# Altium PCB TestBoard.PcbDoc (part 2 of 3)
Units mm, origin at the board's own origin, x right, y up, seen from the top; angles counter-clockwise.
Board outline 300 x 186 mm, 4 copper layers (Top Layer, Mid-Layer 2, Mid-Layer 1, Bottom Layer); 136 components, 264 nets, 1109 pads, 450 vias.
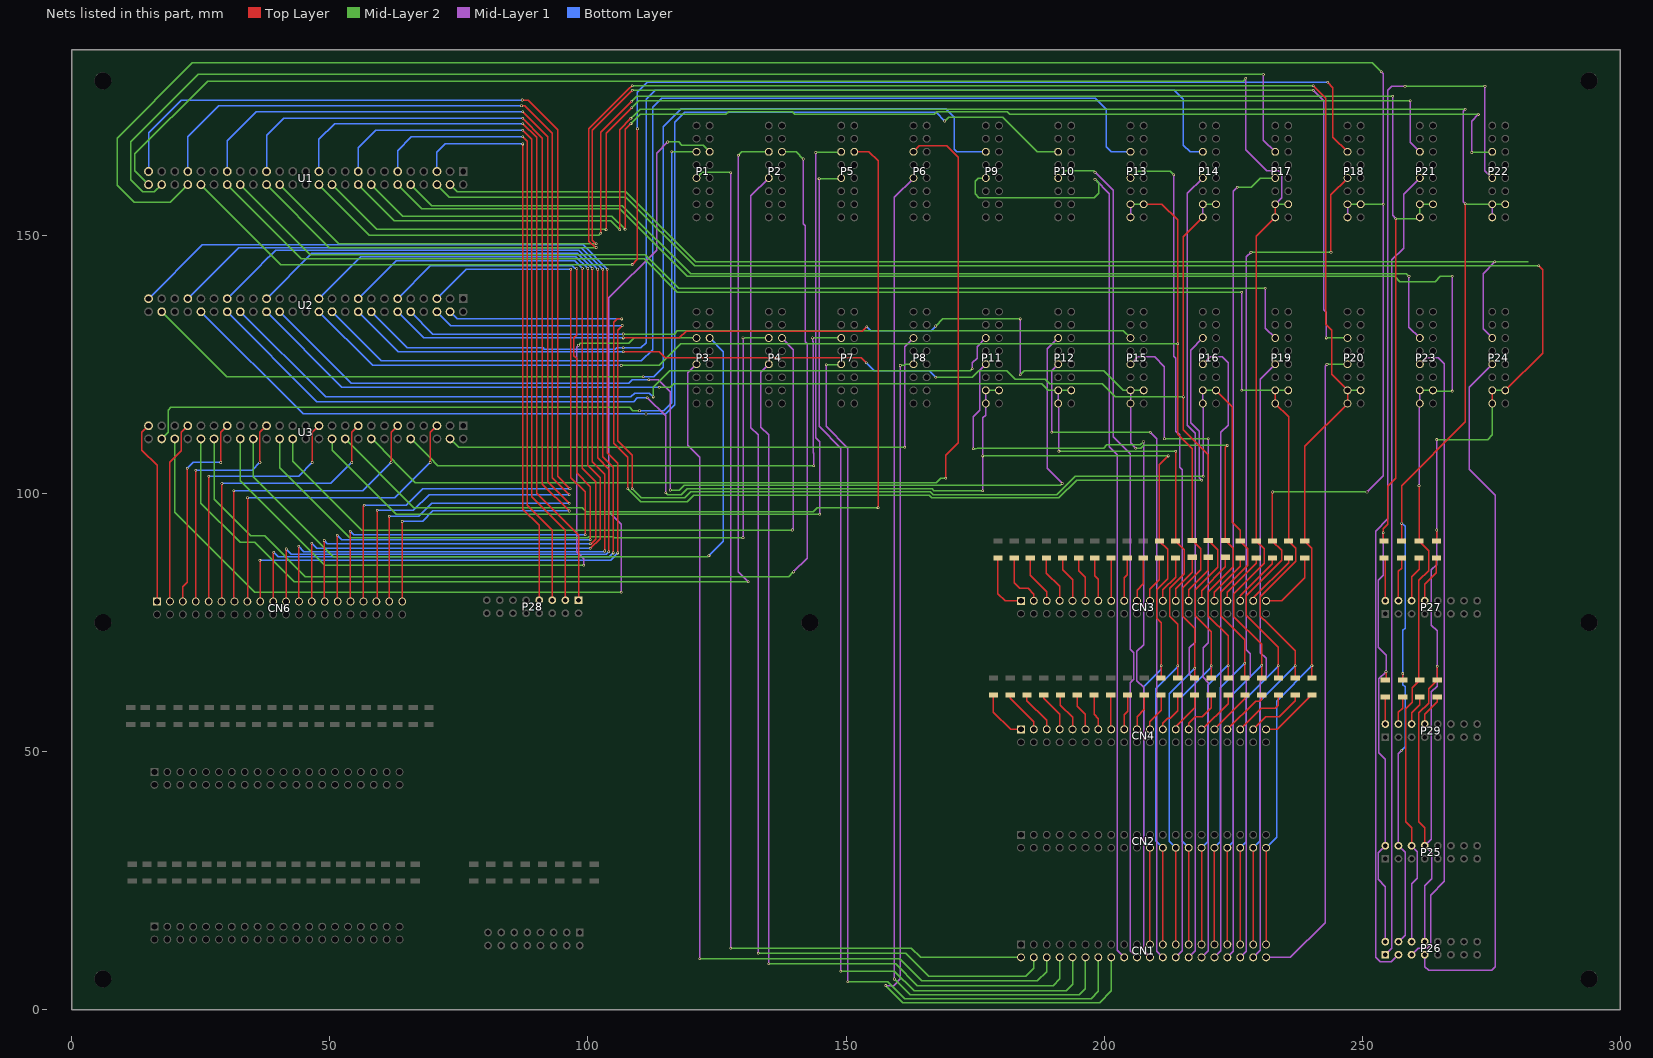
[diagram p4: the nets of this part, all layers, seen from the top]

## Via types
v1: diameter 0.508, hole 0.305, Top Layer to Bottom Layer, tented both sides, 450 vias

## Nets (pads, with @x,y where several pads share a name; then routed paths per layer and width w, separated by ;. In a path a pad name is that pad's centre, name@x,y a point inside that pad or via, vN(x,y) a via of type N, cw(c..) or ccw(c..) an arc to the next point about the centre after c; other vN are vias at no path point) (continued)
GND_RF11: CN1.21 CN2.22 P11.13 P11.14 P11.15 R35.1 R37.1 U2.38 | length 330.9
  Top Layer w0.254: CN1.21@208.895,12.66 CN2.22@208.895,31.389 ; R37.1@211.047,64.262 v1(211.047,66.675) 211.047,74.957 210.185,75.819 210.185,81.407 212.344,83.566 212.344,89.194 R35.1@210.733,90.805 210.733,105.577 v1(212.471,107.315)
  Mid-Layer 1 w0.254: v1(111.506,118.618) 115.062,115.062 v1(115.062,100.203) ; v1(176.53,100.584) v1(176.53,107.315) 176.53,114.681 177.096,115.247 P11.15@177.096,117.475 P11.13@177.096,120.015
  Mid-Layer 2 w0.254: v1(115.062,100.203) 115.443,99.822 118.11,99.822 119.253,100.965 166.668,100.965 167.049,100.584 v1(176.53,100.584) ; v1(176.53,107.315) v1(212.471,107.315) ; P11.13@177.096,120.015 P11.14@179.636,120.015
  Bottom Layer w0.254: U2.38@30.099,135.255 47.498,117.856 108.839,117.856 109.601,118.618 v1(111.506,118.618) ; CN2.22@208.895,31.389 207.645,32.639 207.645,62.611 211.047,66.013 v1(211.047,66.675)
GND_RF12: CN1.23 CN2.24 P12.13 P12.14 P12.15 R38.1 R41.1 U2.32 | length 300.9
  Top Layer w0.254: CN1.23@211.395,12.66 CN2.24@211.395,31.389 ; v1(213.868,108.204) 213.861,108.197 R38.1@213.861,90.805 215.519,89.147 215.519,84.455 212.725,81.661 212.725,76.282 214.296,74.711 v1(214.296,66.675) R41.1@214.296,64.262
  Mid-Layer 1 w0.254: P12.13@191.112,120.015 P12.15@191.112,117.475 191.262,117.325 v1(191.262,108.204)
  Mid-Layer 2 w0.254: v1(113.792,120.65) 115.951,120.65 116.586,121.285 185.674,121.285 187.96,121.285 189.23,120.015 P12.13@191.112,120.015 P12.14@193.652,120.015 ; v1(191.262,108.204) v1(213.868,108.204)
  Bottom Layer w0.254: U2.32@37.719,135.255 52.324,120.65 105.791,120.65 ; 106.934,120.65 105.791,120.65 ; v1(113.792,120.65) 105.791,120.65 ; CN2.24@211.395,31.389 210.058,32.726 210.058,62.23 214.249,66.421
GND_RF13: CN1.25 CN2.26 P13.13 P13.14 P13.15 R42.1 R44.1 U2.24 | length 334.4
  Top Layer w0.254: P13.14@207.668,156.083 211.201,156.083 214.249,153.035 214.249,111.506 217.07,108.685 R42.1@217.07,90.932 218.694,89.308 218.694,85.217 215.252,81.775 215.252,78.755 215.265,78.742 215.265,77.227 215.252,77.214 215.252,76.255 217.544,73.962 R44.1@217.544,64.262 ; CN1.25@213.895,12.66 CN2.26@213.895,31.389
  Mid-Layer 1 w0.254: P13.15@205.128,153.543 P13.13@205.128,156.083
  Mid-Layer 2 w0.254: v1(106.426,124.841) 113.792,124.841 117.983,129.032 v1(214.249,129.032) ; P13.13@205.128,156.083 P13.14@207.668,156.083
  Bottom Layer w0.254: U2.24@47.879,135.255 58.293,124.841 v1(106.426,124.841) ; CN2.26@213.895,31.389 212.598,32.686 212.598,61.214 v1@217.548,66.164
  other v1: 217.544,66.167
GND_RF14: CN1.27 CN2.28 P14.13 P14.14 P14.15 R45.1 R48.1 U2.18 | length 327.1
  Top Layer w0.254: v1(106.807,127.508) 113.792,127.508 114.935,126.365 152.908,126.365 v1(153.924,125.349) ; CN1.27@216.395,12.66 CN2.28@216.395,31.389 ; P14.15@219.144,153.543 215.392,149.791 215.392,112.395 220.198,107.589 R45.1@220.198,90.932 221.996,89.134 221.996,85.725 217.678,81.407 217.678,76.329 220.793,73.214 v1(220.793,66.675) R48.1@220.793,64.262
  Mid-Layer 1 w0.254: P14.15@219.144,153.543 P14.13@219.144,156.083
  Mid-Layer 2 w0.254: v1(167.386,122.555) 174.498,122.555 175.768,123.825 181.102,123.825 182.753,122.174 188.595,122.174 189.484,121.285 193.929,121.285 ; 194.818,121.285 193.929,121.285 ; v1(215.392,118.745) 202.184,118.745 199.644,121.285 193.929,121.285 ; P14.13@219.144,156.083 P14.14@221.684,156.083
  Bottom Layer w0.254: U2.18@55.499,135.255 63.246,127.508 v1(106.807,127.508) ; v1(153.924,125.349) 155.448,123.825 166.116,123.825 v1(167.386,122.555) ; CN2.28@216.395,31.389 215.138,32.646 215.138,60.706 220.853,66.421
GND_RF15: CN1.29 CN2.30 P15.13 P15.14 P15.15 R49.1 R51.1 U2.12 | length 296.6
  Top Layer w0.254: v1(106.807,130.175) 117.729,130.175 118.999,131.445 153.162,131.445 v1(154.051,132.334) ; CN1.29@218.895,12.66 CN2.30@218.895,31.389 ; v1(223.901,109.347) 223.52,108.966 R49.1@223.52,90.932 225.044,89.408 225.044,85.852 220.218,81.026 220.218,76.289 224.041,72.465 v1(224.041,66.675) R51.1@224.041,64.262
  Mid-Layer 1 w0.254: v1(183.769,123.063) v1(183.769,133.858) ; P15.13@205.128,120.015 P15.15@205.128,117.475 205.128,109.832 v1(206.121,108.839)
  Mid-Layer 2 w0.254: v1(167.422,132.486) 168.795,133.858 v1(183.769,133.858) ; v1(183.769,123.063) 184.531,123.825 199.898,123.825 203.708,120.015 P15.13@205.128,120.015 P15.14@207.668,120.015 ; v1(206.121,108.839) 207.137,108.839 207.645,109.347 v1(223.901,109.347)
  Bottom Layer w0.254: U2.12@63.119,135.255 68.199,130.175 v1(106.807,130.175) ; v1(154.051,132.334) 154.813,131.572 166.509,131.572 v1(167.422,132.486) ; CN2.30@218.895,31.389 220.091,32.585 220.091,62.865 v1@223.901,66.675
GND_RF16: CN1.31 CN2.32 P16.13 P16.14 P16.15 R52.1 R55.1 U2.6 | length 322.3
  Top Layer w0.254: v1(106.68,132.588) 105.791,131.699 105.791,110.236 108.585,107.442 v1(108.585,100.965) ; CN1.31@221.395,12.66 CN2.32@221.395,31.389 ; P16.14@221.684,120.015 224.825,116.875 224.825,94.513 226.374,92.964 R52.1@226.374,90.805 227.838,89.341 227.838,86.106 222.631,80.899 222.631,76.376 227.29,71.717 v1(227.29,67.143) R55.1@227.29,64.262
  Mid-Layer 1 w0.254: P16.13@219.144,120.015 P16.15@219.144,117.475 219.202,117.417 v1(219.202,103.378)
  Mid-Layer 2 w0.254: v1(108.585,100.965) 110.363,99.187 118.745,99.187 119.888,100.33 166.37,100.33 166.878,99.822 190.881,99.822 194.437,103.378 v1(219.202,103.378) ; P16.13@219.144,120.015 P16.14@221.684,120.015
  Bottom Layer w0.254: U2.6@70.739,135.255 73.406,132.588 v1(106.68,132.588) ; CN2.32@221.395,31.389 222.538,32.532 222.538,34.396 222.504,34.43 222.504,51.322 222.538,51.356 222.538,54.837 222.504,54.871 222.504,62.357 v1(227.29,67.143)
GND_RF17: CN1.33 CN2.34 P17.13 P17.14 P17.15 R56.1 R58.1 U1.50 | length 416.5
  Top Layer w0.254: CN1.33@223.895,12.66 CN2.34@223.895,31.389 ; R58.1@230.538,64.262 v1(230.538,66.769) 230.538,70.833 225.171,76.2 225.171,80.645 231.013,86.487 231.013,89.294 R56.1@229.502,90.805 229.502,145.555 229.502,149.885 P17.15@233.16,153.543 P17.13@233.16,156.083
  Mid-Layer 1 w0.254: v1(227.457,180.467) 227.457,166.624 231.521,162.56 233.888,162.56 234.442,162.006 234.442,157.365 P17.13@233.16,156.083
  Mid-Layer 2 w0.254: U1.50@14.859,159.893 12.192,162.56 12.192,165.862 26.289,179.959 152.527,179.959 ; 153.416,179.959 152.527,179.959 ; v1(227.457,180.467) 226.949,179.959 152.527,179.959 ; P17.13@233.16,156.083 P17.14@235.7,156.083
  Bottom Layer w0.254: CN2.34@223.895,31.389 225.044,32.538 225.044,61.274 v1(230.538,66.769)
GND_RF18: CN1.35 CN2.36 P18.13 P18.14 P18.15 R59.1 R62.1 U1.44 | length 487.9
  Top Layer w0.254: CN1.35@226.395,12.66 CN2.36@226.395,31.389 ; v1(232.664,100.33) 232.631,100.297 R59.1@232.631,90.805 234.442,88.994 234.442,87.122 227.538,80.218 227.538,76.469 228.422,75.585 228.453,75.585 233.787,70.251 v1(233.787,66.675) R62.1@233.787,64.262
  Mid-Layer 1 w0.254: P18.15@247.177,153.543 P18.13@247.177,156.083 ; v1(250.952,100.33) 254.127,103.505 254.127,154.94 ; v1(253.746,181.737) 254.127,181.356 v1(254.127,156.083) 254.127,154.94 ; 254.127,155.702 254.127,154.94
  Mid-Layer 2 w0.254: U1.44@22.479,159.893 19.05,156.464 12.065,156.464 8.763,159.766 8.763,168.91 23.368,183.515 251.968,183.515 v1(253.746,181.737) ; v1(232.664,100.33) v1(250.952,100.33) ; P18.13@247.177,156.083 P18.14@249.717,156.083 v1(254.127,156.083)
  Bottom Layer w0.254: CN2.36@226.395,31.389 227.584,32.578 227.584,60.325 233.68,66.421
GND_RF19: CN1.37 CN2.38 P19.13 P19.14 P19.15 R63.1 R65.1 U1.38 | length 353.7
  Top Layer w0.254: CN1.37@228.895,12.66 CN2.38@228.895,31.389 ; P19.13@233.16,120.015 P19.15@233.16,117.475 235.759,114.877 R63.1@235.759,90.805 237.109,89.455 237.109,86.868 230.251,80.01 230.251,76.256 230.922,75.585 230.993,75.585 237.035,69.543 v1(237.035,66.675) R65.1@237.035,64.262
  Mid-Layer 1 w0.254: v1(226.695,120.015) v1(226.695,139.065)
  Mid-Layer 2 w0.254: U1.38@30.099,159.893 44.45,145.542 110.871,145.542 117.348,139.065 v1(226.695,139.065) ; v1(226.695,120.015) P19.13@233.16,120.015 P19.14@235.7,120.015
  Bottom Layer w0.254: CN2.38@228.895,31.389 230.124,32.618 230.124,59.764 v1(237.035,66.675)
GND_RF20: CN1.39 CN2.40 P20.13 P20.14 P20.15 R66.1 R69.1 U1.32 | length 418.2
  Top Layer w0.254: v1(101.6,147.701) 101.464,147.701 100.203,148.962 100.203,170.688 107.95,178.435 107.95,178.444 108.576,179.07 v1(108.585,179.07) ; CN1.39@231.395,12.66 CN2.40@231.395,31.389 ; R69.1@240.284,64.262 v1(240.284,66.675) 240.284,89.408 R66.1@238.887,90.805 238.887,109.185 P20.15@247.177,117.475 P20.13@247.177,120.015 244.094,123.098 244.094,131.699 242.951,132.842 242.951,176.666 240.547,179.07 v1(240.538,179.07)
  Mid-Layer 2 w0.254: U1.32@37.719,159.893 49.911,147.701 v1(101.6,147.701) ; v1(108.585,179.07) v1(240.538,179.07) ; P20.13@247.177,120.015 P20.14@249.717,120.015
  Bottom Layer w0.254: CN2.40@231.395,31.389 233.426,33.42 233.426,59.817 v1(240.284,66.675)
GND_RF21: P21.13 P21.14 P21.15 P25.9 P26.9 R81.1 R83.1 U1.24 | length 418.6
  Top Layer w0.254: v1(102.489,150.495) 102.489,170.053 v1(108.458,176.022) ; R81.1@254.254,90.805 254.127,90.932 v1(254.127,92.456) 254.127,93.218 255.016,94.107 255.016,101.473 256.54,102.997 256.54,151.384 ; R83.1@254.508,63.881 254.635,64.008 v1(254.635,65.532) ; 256.54,152.019 256.54,151.384 ; v1(256.54,153.289) 256.54,151.384
  Mid-Layer 1 w0.254: v1(254.127,92.456) 254.127,84.201 253.111,83.185 253.111,70.231 254.635,68.707 v1(254.635,65.532) 253.238,64.135 253.238,49.784 254.508,48.514 P25.9@254.508,31.792 253.111,30.395 253.111,25.273 254.508,23.876 P26.9@254.508,13.208 ; 255.905,159.512 255.905,161.163 ; v1(255.905,177.038) 255.905,161.163 ; v1(256.54,153.289) 255.905,153.924 255.905,161.163
  Mid-Layer 2 w0.254: U1.24@47.879,159.893 57.658,150.114 102.108,150.114 v1(102.489,150.495) ; v1(108.458,176.022) 109.474,177.038 v1(255.905,177.038) ; v1(256.54,153.289) 260.939,153.289 P21.15@261.193,153.543 P21.13@261.193,156.083 P21.14@263.733,156.083
GND_RF22: P22.13 P22.14 P22.15 P25.10 P26.10 R77.1 R80.1 U1.18 | length 423.2
  Top Layer w0.254: v1(106.172,151.13) 106.172,170.561 v1(108.331,172.72) ; R77.1@257.641,90.805 v1(257.641,94.234) 257.641,101.558 270.002,113.919 v1(270.002,156.21) ; R80.1@257.852,63.881 257.91,63.939 v1(257.91,65.151)
  Mid-Layer 1 w0.254: P26.10@257.048,13.208 258.318,14.478 258.318,30.522 P25.10@257.048,31.792 257.048,49.657 v1(257.683,50.292) ; v1(270.002,156.21) 269.621,156.591 269.621,174.117 v1(270.002,174.498) ; P22.15@275.209,153.543 P22.13@275.209,156.083
  Mid-Layer 2 w0.254: U1.18@55.499,159.893 62.484,152.908 104.394,152.908 v1(106.172,151.13) ; v1@108.34,172.72 108.966,173.346 ; 108.966,173.355 110.109,174.498 v1(270.002,174.498) ; v1(270.002,156.21) 270.129,156.083 P22.13@275.209,156.083 P22.14@277.749,156.083
  Bottom Layer w0.254: v1(257.683,50.292) 258.318,50.927 258.318,62.611 257.91,63.019 v1(257.91,65.151) 257.91,73.506 258.318,73.914 258.318,93.684 v1@257.704,94.297
GND_RF23: P23.13 P23.14 P23.15 P25.11 P26.11 R74.1 R76.1 U1.12 | length 353.6
  Top Layer w0.254: P25.11@259.588,31.792 259.588,35.306 258.445,36.449 258.445,58.293 259.715,59.563 259.715,62.399 R76.1@261.197,63.881 260.997,64.081 260.997,83.197 262.89,85.09 262.89,88.942 R74.1@261.027,90.805 v1(261.027,101.515)
  Mid-Layer 1 w0.254: P26.11@259.588,13.208 259.588,24.384 260.731,25.527 260.731,30.649 P25.11@259.588,31.792 ; v1(261.027,101.515) 261.027,117.31 P23.15@261.193,117.475 P23.13@261.193,120.015 ; v1(267.462,119.888) v1(267.462,142.113)
  Mid-Layer 2 w0.254: U1.12@63.119,159.893 67.818,155.194 106.172,155.194 119.253,142.113 251.714,142.113 256.286,142.113 257.302,141.097 264.16,141.097 265.176,142.113 ; P23.13@261.193,120.015 P23.14@263.733,120.015 263.86,119.888 v1(267.462,119.888) ; 266.573,142.113 265.176,142.113 ; v1(267.462,142.113) 265.176,142.113
GND_RF24: P24.13 P24.14 P24.15 P25.12 P26.12 R71.1 R73.1 U1.6 | length 409.3
  Top Layer w0.254: P25.12@262.128,31.792 262.128,35.306 260.985,36.449 260.985,57.531 262.89,59.436 262.89,62.23 R73.1@264.541,63.881 v1(264.541,66.548) v1@264.541,66.675 ; R71.1@264.414,90.805 264.43,90.821 v1(264.43,92.964) ; P24.15@275.209,117.475 P24.13@275.209,120.015 ; P24.14@277.749,120.015 284.988,127.254 284.988,143.383 v1(284.226,144.145)
  Mid-Layer 1 w0.254: P26.12@262.128,13.208 262.128,24.003 263.525,25.4 263.525,30.395 P25.12@262.128,31.792 263.398,33.062 263.398,61.595 264.541,62.738 v1(264.541,66.548) 264.541,73.406 263.398,74.549 263.398,85.217 264.43,86.249 v1(264.43,92.964) v1(264.43,110.49)
  Mid-Layer 2 w0.254: U1.6@70.739,159.893 73.152,157.48 107.315,157.48 120.65,144.145 v1(284.226,144.145) ; v1@264.287,110.49 274.32,110.49 275.209,111.379 P24.15@275.209,117.475 ; P24.13@275.209,120.015 P24.14@277.749,120.015
"IN_DCIN_3.3V _RF1": CN6.1 U3.49 | length 35.8
  Top Layer w0.254: U3.49@14.859,113.157 13.589,111.887 13.589,108.458 16.509,105.538 CN6.1@16.509,79.101
"IN_DCIN_3.3V _RF2": CN6.3 U3.43 | length 35.5
  Top Layer w0.254: CN6.3@19.009,79.101 19.009,85.471 19.009,106.131 21.209,108.331 21.209,111.887 U3.43@22.479,113.157
"IN_DCIN_3.3V _RF3": CN6.5 U3.37 | length 40.7
  Top Layer w0.254: CN6.5@21.509,79.101 21.509,81.961 22.352,82.804 v1(22.352,104.902) ; v1(28.829,106.045) 28.829,111.887 U3.37@30.099,113.157
  Bottom Layer w0.254: v1(22.352,104.902) 23.495,106.045 v1(28.829,106.045)
"IN_DCIN_3.3V _RF4": CN6.7 U3.31 | length 46.1
  Top Layer w0.254: v1(24.003,104.521) 24.003,79.107 CN6.7@24.009,79.101 ; v1(36.449,106.045) 36.449,111.887 U3.31@37.719,113.157
  Bottom Layer w0.254: v1(24.003,104.521) 34.925,104.521 v1(36.449,106.045)
"IN_DCIN_3.3V _RF5": CN6.9 U3.23 | length 53.1
  Top Layer w0.254: CN6.9@26.509,79.101 26.543,79.135 v1(26.543,103.378) ; v1(46.609,106.045) 46.609,111.887 U3.23@47.879,113.157
  Bottom Layer w0.254: v1(26.543,103.378) 43.942,103.378 v1(46.609,106.045)
"IN_DCIN_3.3V _RF6": CN6.11 U3.17 | length 57.4
  Top Layer w0.254: CN6.11@29.009,79.101 29.083,79.175 v1(29.083,101.981) ; v1(54.229,106.045) 54.229,111.887 U3.17@55.499,113.157
  Bottom Layer w0.254: v1(29.083,101.981) 50.165,101.981 v1(54.229,106.045)
"IN_DCIN_3.3V _RF7": CN6.13 U3.11 | length 61.9
  Top Layer w0.254: v1(31.369,100.584) 31.369,79.241 CN6.13@31.509,79.101 ; v1(61.849,106.045) 61.849,111.887 U3.11@63.119,113.157
  Bottom Layer w0.254: v1(31.369,100.584) 56.388,100.584 v1(61.849,106.045)
"IN_DCIN_3.3V _RF8": CN6.15 U3.5 | length 66
  Top Layer w0.254: CN6.15@34.009,79.101 34.036,79.128 v1(34.036,99.187) ; v1(69.469,106.045) 69.469,111.887 U3.5@70.739,113.157
  Bottom Layer w0.254: v1(34.036,99.187) 62.611,99.187 v1(69.469,106.045)
"IN_DCIN_3.3V _RF9": CN6.17 U2.49 | length 229
  Top Layer w0.254: v1(36.449,87.122) 36.509,87.062 CN6.17@36.509,79.101 ; v1(103.759,143.51) 103.759,107.95 105.791,105.918 v1(105.791,88.519)
  Bottom Layer w0.254: U2.49@14.859,137.795 25.273,148.209 99.069,148.209 103.759,143.519 v1(103.759,143.51) ; v1(36.449,87.122) 104.403,87.122 105.791,88.51 v1(105.791,88.519)
"IN_DCIN_3.3V _RF10": CN6.19 U2.43 | length 218.1
  Top Layer w0.254: CN6.19@39.009,79.101 39.009,88.539 v1(39.116,88.646) ; v1(102.87,143.51) 102.87,117.348 102.87,107.188 104.902,105.156 v1(104.902,88.519)
  Bottom Layer w0.254: U2.43@22.479,137.795 32.385,147.701 98.679,147.701 v1(102.87,143.51) ; v1(39.116,88.646) 40.005,87.757 104.14,87.757 v1(104.902,88.519)
"IN_DCIN_3.3V _RF11": CN6.21 U2.37 | length 206.1
  Top Layer w0.254: CN6.21@41.509,79.101 41.529,79.121 v1(41.529,89.281) ; v1(101.854,143.51) 101.854,106.934 104.013,104.775 v1(104.013,88.773)
  Bottom Layer w0.254: U2.37@30.099,137.795 36.703,144.399 36.83,144.526 39.497,147.193 98.18,147.193 101.854,143.519 v1(101.854,143.51) ; v1(41.529,89.281) 42.545,88.265 103.514,88.265 104.013,88.764 v1(104.013,88.773)
"IN_DCIN_3.3V _RF12": CN6.23 U2.31 | length 194.2
  Top Layer w0.254: v1(43.942,89.789) 43.942,79.168 CN6.23@44.009,79.101 ; v1(100.838,143.637) 100.838,106.172 103.251,103.759 v1(103.251,88.9)
  Bottom Layer w0.254: U2.31@37.719,137.795 46.482,146.558 97.926,146.558 100.838,143.646 v1(100.838,143.637) ; v1(43.942,89.789) 44.958,88.773 103.124,88.773 v1(103.251,88.9)
"IN_DCIN_3.3V _RF13": CN6.25 U2.23 | length 178.1
  Top Layer w0.254: v1(46.482,90.424) 46.482,79.128 CN6.25@46.509,79.101 ; v1(99.949,143.637) 99.949,105.537 102.362,103.124 102.362,91.304 100.466,89.408 v1(100.457,89.408)
  Bottom Layer w0.254: v1(46.482,90.424) 47.498,89.408 v1(100.457,89.408) ; U2.23@47.879,137.795 56.007,145.923 97.663,145.923 v1(99.949,143.637)
"IN_DCIN_3.3V _RF14": CN6.27 U2.17 | length 165.7
  Top Layer w0.254: v1(48.895,90.932) 48.895,79.215 CN6.27@49.009,79.101 ; v1(98.933,143.637) 98.933,104.902 101.473,102.362 101.473,91.177 100.593,90.297 v1(100.457,90.297)
  Bottom Layer w0.254: v1(48.895,90.932) 49.53,90.297 v1(100.457,90.297) ; U2.17@55.499,137.795 62.865,145.161 97.409,145.161 v1(98.933,143.637)
"IN_DCIN_3.3V _RF15": CN6.29 U2.11 | length 154
  Top Layer w0.254: v1(51.435,91.948) 51.435,79.175 CN6.29@51.509,79.101 ; v1@97.79,143.764 v1(97.79,143.637) 97.79,130.683 97.282,130.175 97.282,126.746 97.79,126.238 97.79,104.013 100.457,101.346 v1(100.457,91.059)
  Bottom Layer w0.254: v1(51.435,91.948) 52.324,91.059 v1(100.457,91.059) ; U2.11@63.119,137.795 69.469,144.145 96.91,144.145 97.418,143.637 v1(97.79,143.637)
"IN_DCIN_3.3V _RF16": CN6.31 U2.5 | length 140.2
  Top Layer w0.254: v1(53.975,92.71) 53.975,79.135 CN6.31@54.009,79.101 ; v1(96.647,143.51) 96.647,103.124 99.441,100.33 v1(99.441,92.075)
  Bottom Layer w0.254: v1(53.975,92.71) 54.61,92.075 v1(99.441,92.075) ; U2.5@70.739,137.795 76.454,143.51 v1(96.647,143.51)
"IN_DCIN_3.3V _RF17": CN6.33 U1.49 | length 222.3
  Top Layer w0.254: CN6.33@56.509,79.101 56.509,97.657 v1(56.642,97.79) ; v1(87.249,176.276) 88.392,176.276 94.107,170.561 94.107,103.378 v1(96.52,100.965)
  Bottom Layer w0.254: U1.49@14.859,162.433 14.859,169.926 21.209,176.276 v1(87.249,176.276) ; v1(56.642,97.79) 64.77,97.79 67.945,100.965 v1(96.52,100.965)
"IN_DCIN_3.3V _RF18": CN6.35 U1.43 | length 209.6
  Top Layer w0.254: CN6.35@59.009,79.101 59.182,79.274 v1(59.182,96.774) ; v1(87.122,175.133) 87.757,175.133 93.091,169.799 93.091,103.124 v1(96.393,99.822)
  Bottom Layer w0.254: U1.43@22.479,162.433 22.479,169.164 28.448,175.133 v1(87.122,175.133) ; v1(59.182,96.774) 66.167,96.774 69.215,99.822 v1(96.393,99.822)
"IN_DCIN_3.3V _RF19": CN6.37 U1.37 | length 197.6
  Top Layer w0.254: v1(61.468,95.631) 61.468,79.142 CN6.37@61.509,79.101 ; v1(87.376,173.99) 92.202,169.164 92.202,102.362 v1(96.393,98.171)
  Bottom Layer w0.254: U1.37@30.099,162.433 30.099,168.402 35.687,173.99 v1(87.376,173.99) ; v1(61.468,95.631) 67.183,95.631 69.723,98.171 v1(96.393,98.171)
"IN_DCIN_3.3V _RF20": CN6.39 U1.31 | length 186.6
  Top Layer w0.254: v1(64.008,94.615) 64.008,79.102 CN6.39@64.009,79.101 ; v1(87.376,172.72) 91.186,168.91 91.186,101.854 v1(96.393,96.647)
  Bottom Layer w0.254: U1.31@37.719,162.433 37.719,169.418 41.021,172.72 v1(87.376,172.72) ; v1(64.008,94.615) 67.945,94.615 69.977,96.647 v1(96.393,96.647)
"IN_DCIN_3.3V _RF21": P28.1 U1.23 | length 143.8
  Top Layer w0.254: v1(87.376,171.704) 90.043,169.037 90.043,100.076 98.171,91.948 P28.1@98.171,79.375
  Bottom Layer w0.254: U1.23@47.879,162.433 47.879,168.656 50.927,171.704 v1(87.376,171.704)
"IN_DCIN_3.3V _RF22": P28.2 U1.17 | length 132.3
  Top Layer w0.254: v1(87.376,170.434) 89.154,168.656 89.154,99.441 95.631,92.964 P28.2@95.631,79.375
  Bottom Layer w0.254: U1.17@55.499,162.433 55.499,167.005 58.928,170.434 v1(87.376,170.434)
"IN_DCIN_3.3V _RF23": P28.3 U1.11 | length 121.6
  Top Layer w0.254: v1(87.376,169.164) 88.265,168.275 88.265,97.79 93.091,92.964 P28.3@93.091,79.375
  Bottom Layer w0.254: U1.11@63.119,162.433 63.119,166.497 65.786,169.164 v1(87.376,169.164)
"IN_DCIN_3.3V _RF24": P28.4 U1.5 | length 110.7
  Top Layer w0.254: v1(87.376,167.767) 87.376,97.028 90.551,93.853 P28.4@90.551,79.375
  Bottom Layer w0.254: U1.5@70.739,162.433 70.739,166.116 72.39,167.767 v1(87.376,167.767)
NetCN3_1: CN3.1 R1.2 | length 12.6
  Top Layer w0.254: R1.2@179.451,87.555 179.451,80.645 180.868,79.228 CN3.1@184.53,79.228
NetCN3_3: CN3.3 R3.2 | length 10.9
  Top Layer w0.254: R3.2@182.579,87.555 182.579,82.724 183.642,81.661 185.293,81.661 186.395,80.559 CN3.3@186.395,79.228
NetCN3_5: CN3.5 R7.2 | length 9.6
  Top Layer w0.254: R7.2@185.707,87.555 185.707,84.168 188.895,80.98 CN3.5@188.895,79.228
NetCN3_7: CN3.7 R10.2 | length 9.4
  Top Layer w0.254: R10.2@188.836,87.555 188.836,84.595 191.395,82.036 CN3.7@191.395,79.228
NetCN3_9: CN3.9 R14.2 | length 9.1
  Top Layer w0.254: R14.2@191.964,87.555 191.964,85.277 193.895,83.346 CN3.9@193.895,79.228
NetCN3_11: CN3.11 R17.2 | length 8.9
  Top Layer w0.254: R17.2@195.092,87.555 195.092,85.07 196.395,83.767 CN3.11@196.395,79.228
NetCN3_13: CN3.13 R21.2 | length 8.6
  Top Layer w0.254: R21.2@198.22,87.555 198.22,84.101 198.895,83.426 CN3.13@198.895,79.228
NetCN3_15: CN3.15 R24.2 | length 8.3
  Top Layer w0.254: R24.2@201.348,87.555 201.348,82.931 201.395,82.884 CN3.15@201.395,79.228
NetCN3_17: CN3.17 R28.2 | length 8.6
  Top Layer w0.254: CN3.17@203.895,79.228 203.895,83.746 204.477,84.328 R28.2@204.477,87.555
NetCN3_19: CN3.19 R31.2 | length 8.8
  Top Layer w0.254: CN3.19@206.395,79.228 206.395,81.3 207.605,82.51 R31.2@207.605,87.555
NetCN3_21: CN3.21 R35.2 | length 9.1
  Top Layer w0.254: CN3.21@208.895,79.228 208.895,81.514 210.733,83.352 R35.2@210.733,87.555
NetCN3_23: CN3.23 R38.2 | length 9.3
  Top Layer w0.254: CN3.23@211.395,79.228 211.395,81.347 213.861,83.813 R38.2@213.861,87.555
NetCN3_25: CN3.25 R42.2 | length 9.8
  Top Layer w0.254: CN3.25@213.895,79.228 213.895,81.561 217.07,84.736 R42.2@217.07,87.682
NetCN3_27: CN3.27 R45.2 | length 10
  Top Layer w0.254: CN3.27@216.395,79.228 216.395,81.394 220.198,85.197 R45.2@220.198,87.682
NetCN3_29: CN3.29 R49.2 | length 10.4
  Top Layer w0.254: CN3.29@218.895,79.228 218.895,81.227 223.52,85.852 R49.2@223.52,87.682
NetCN3_31: CN3.31 R52.2 | length 10.4
  Top Layer w0.254: CN3.31@221.395,79.228 221.395,80.933 222.03,81.568 222.136,81.674 226.374,85.912 R52.2@226.374,87.555
NetCN3_33: CN3.33 R56.2 | length 10.6
  Top Layer w0.254: CN3.33@223.895,79.228 223.895,80.893 229.502,86.5 R56.2@229.502,87.555
NetCN3_35: CN3.35 R59.2 | length 10.9
  Top Layer w0.254: CN3.35@226.395,79.228 226.395,80.218 232.631,86.454 R59.2@232.631,87.555
NetCN3_37: CN3.37 R63.2 | length 11.2
  Top Layer w0.254: CN3.37@228.895,79.228 228.895,79.797 235.759,86.661 R63.2@235.759,87.555
NetCN3_39: CN3.39 R66.2 | length 12.6
  Top Layer w0.254: CN3.39@232.03,79.228 234.422,79.228 238.887,83.693 R66.2@238.887,87.555
NetCN4_1: CN4.1 R2.2 | length 10.1
  Top Layer w0.254: R2.2@178.562,61.012 178.562,57.658 181.891,54.329 CN4.1@183.895,54.329
NetCN4_3: CN4.3 R6.2 | length 8.6
  Top Layer w0.254: R6.2@181.811,61.012 181.811,60.378 186.395,55.794 CN4.3@186.395,54.329
NetCN4_5: CN4.5 R9.2 | length 8.3
  Top Layer w0.254: R9.2@185.059,61.012 185.059,59.924 188.895,56.088 CN4.5@188.895,54.329
NetCN4_7: CN4.7 R13.2 | length 8
  Top Layer w0.254: R13.2@188.308,61.012 188.308,60.358 191.395,57.271 CN4.7@191.395,54.329
NetCN4_9: CN4.9 R16.2 | length 7.7
  Top Layer w0.254: R16.2@191.556,61.012 191.556,59.015 193.895,56.676 CN4.9@193.895,54.329
NetCN4_11: CN4.11 R20.2 | length 7.3
  Top Layer w0.254: R20.2@194.805,61.012 194.805,58.814 196.395,57.224 CN4.11@196.395,54.329
NetCN4_13: CN4.13 R23.2 | length 7
  Top Layer w0.254: R23.2@198.053,61.012 198.053,57.217 198.895,56.375 CN4.13@198.895,54.329
NetCN4_15: CN4.15 R27.2 | length 6.7
  Top Layer w0.254: R27.2@201.302,61.012 201.302,54.423 CN4.15@201.395,54.329
NetCN4_17: CN4.17 R30.2 | length 7
  Top Layer w0.254: CN4.17@203.895,54.329 203.895,57.21 204.55,57.865 R30.2@204.55,61.012
NetCN4_19: CN4.19 R34.2 | length 7.3
  Top Layer w0.254: CN4.19@206.395,54.329 206.395,56.789 207.799,58.193 R34.2@207.799,61.012
NetCN4_21: CN4.21 R37.2 | length 7.6
  Top Layer w0.254: CN4.21@208.895,54.329 208.895,55.86 211.047,58.012 R37.2@211.047,61.012
NetCN4_23: CN4.23 R41.2 | length 8.2
  Top Layer w0.254: CN4.23@211.395,54.329 211.395,55.566 212.344,56.515 212.852,56.515 214.296,57.959 R41.2@214.296,61.012
NetCN4_25: CN4.25 R44.2 | length 8.2
  Top Layer w0.254: CN4.25@213.895,54.329 213.895,54.891 217.544,58.54 R44.2@217.544,61.012
NetCN4_27: CN4.27 R48.2 | length 9.3
  Top Layer w0.254: CN4.27@216.395,54.329 216.395,55.486 217.678,56.769 219.075,56.769 220.793,58.487 R48.2@220.793,61.012
NetCN4_29: CN4.29 R51.2 | length 8.9
  Top Layer w0.254: CN4.29@218.895,54.329 219.048,54.329 224.041,59.322 R51.2@224.041,61.012
NetCN4_31: CN4.31 R55.2 | length 9.1
  Top Layer w0.254: CN4.31@221.395,54.329 227.29,60.224 R55.2@227.29,61.012
NetCN4_33: CN4.33 R58.2 | length 9.9
  Top Layer w0.254: CN4.33@223.895,54.329 229.383,59.817 230.157,59.817 230.538,60.198 R58.2@230.538,61.012
NetCN4_35: CN4.35 R62.2 | length 11.3
  Top Layer w0.254: CN4.35@226.395,54.329 230.486,58.42 233.045,58.42 233.172,58.42 233.787,59.035 R62.2@233.787,61.012
NetCN4_37: CN4.37 R65.2 | length 11.6
  Top Layer w0.254: CN4.37@228.895,54.329 231.335,56.769 233.934,56.769 237.035,59.87 R65.2@237.035,61.012
NetCN4_39: CN4.39 R69.2 | length 11.7
  Top Layer w0.254: CN4.39@231.395,54.329 233.601,54.329 R69.2@240.284,61.012
NetP27_9: P27.9 R81.2 | length 8.1
  Top Layer w0.254: P27.9@254.508,79.248 R81.2@254.508,87.301
NetP27_10: P27.10 R77.2 | length 8.6
  Top Layer w0.254: P27.10@257.048,79.248 257.048,84.963 257.641,85.556 R77.2@257.641,87.555
NetP27_11: P27.11 R74.2 | length 8.9
  Top Layer w0.254: P27.11@259.588,79.248 259.588,83.947 261.027,85.386 R74.2@261.027,87.555
NetP27_12: P27.12 R71.2 | length 9.3
  Top Layer w0.254: P27.12@262.128,79.248 262.128,82.423 264.414,84.709 R71.2@264.414,87.555
NetP29_9: P29.9 R83.2 | length 5.3
  Top Layer w0.254: P29.9@254.508,55.372 R83.2@254.508,60.631
NetP29_10: P29.10 R80.2 | length 5.6
  Top Layer w0.254: P29.10@257.048,55.372 257.048,57.658 257.852,58.462 R80.2@257.852,60.631
NetP29_11: P29.11 R76.2 | length 5.9
  Top Layer w0.254: P29.11@259.588,55.372 259.588,57.531 261.197,59.14 R76.2@261.197,60.631
NetP29_12: P29.12 R73.2 | length 6.3
  Top Layer w0.254: P29.12@262.128,55.372 262.128,57.277 264.541,59.69 R73.2@264.541,60.631
RESET_RF1: CN1.2 P1.9 | length 214.4
  Mid-Layer 1 w0.254: v1(127.635,11.938) v1(127.635,162.179)
  Mid-Layer 2 w0.254: P1.9@121.031,161.163 122.174,162.306 127.508,162.306 v1(127.635,162.179) ; v1(127.635,11.938) 162.687,11.938 164.465,10.16 CN1.2@183.895,10.16
RESET_RF2: CN1.4 P2.9 | length 210.3
  Mid-Layer 1 w0.254: v1(132.969,10.922) 132.969,111.379 131.572,112.776 131.572,157.688 P2.9@135.047,161.163
  Mid-Layer 2 w0.254: v1(132.969,10.922) 161.544,10.922 165.989,6.477 184.785,6.477 186.395,8.087 CN1.4@186.395,10.16
RESET_RF3: CN1.6 P3.9 | length 189.3
  Mid-Layer 1 w0.254: P3.9@121.031,125.095 119.38,123.444 119.38,109.347 121.666,107.061 v1(121.666,9.906)
  Mid-Layer 2 w0.254: v1(121.666,9.906) 160.401,9.906 164.719,5.588 187.071,5.588 188.895,7.412 CN1.6@188.895,10.16
RESET_RF4: CN1.8 P4.9 | length 180.3
  Mid-Layer 1 w0.254: v1(135.001,8.89) 135.001,111.379 133.477,112.903 133.477,123.525 P4.9@135.047,125.095
  Mid-Layer 2 w0.254: v1(135.001,8.89) 159.639,8.89 163.83,4.699 190.119,4.699 191.395,5.975 CN1.8@191.395,10.16
RESET_RF5: CN1.10 P5.9 | length 212
  Mid-Layer 1 w0.254: v1@144.78,161.163 v1(144.78,161.036) 144.78,113.03 148.971,108.839 v1(148.971,7.493)
  Mid-Layer 2 w0.254: v1(144.78,161.036) 148.936,161.036 P5.9@149.063,161.163 ; v1(148.971,7.493) 159.385,7.493 163.195,3.683 192.659,3.683 193.895,4.919 CN1.10@193.895,10.16
RESET_RF6: CN1.12 P6.9 | length 201.5
  Mid-Layer 1 w0.254: v1(159.385,5.969) 159.385,157.468 P6.9@163.08,161.163
  Mid-Layer 2 w0.254: v1(159.385,5.969) 162.433,2.921 195.199,2.921 196.395,4.117 CN1.12@196.395,10.16
RESET_RF7: CN1.14 P7.9 | length 181.3
  Mid-Layer 1 w0.254: v1(146.177,124.968) 146.177,113.03 150.368,108.839 v1(150.368,5.461)
  Mid-Layer 2 w0.254: v1(146.177,124.968) 148.936,124.968 P7.9@149.063,125.095 ; v1(150.368,5.461) 158.115,5.461 161.417,2.159 197.485,2.159 198.895,3.569 CN1.14@198.895,10.16
RESET_RF8: CN1.16 P8.9 | length 177.3
  Mid-Layer 1 w0.254: v1(157.734,4.699) 159.258,4.699 160.528,5.969 v1(160.528,124.841)
  Mid-Layer 2 w0.254: v1(157.734,4.699) 161.036,1.397 199.136,1.397 201.395,3.656 CN1.16@201.395,10.16 ; v1(160.528,124.841) 161.29,124.841 161.544,125.095 P8.9@163.08,125.095
RESET_RF9: CN1.18 P9.9 | length 185.5
  Mid-Layer 1 w0.254: v1(198.247,160.909) 201.041,158.115 201.041,109.093 202.565,107.569 202.565,11.49 CN1.18@203.895,10.16
  Mid-Layer 2 w0.254: P9.9@177.096,161.163 175.641,161.163 175.006,160.528 175.006,158.115 175.768,157.353 198.12,157.353 199.009,158.242 199.009,160.147 v1(198.247,160.909)
RESET_RF10: CN1.20 P10.9 | length 163.9
  Mid-Layer 1 w0.254: v1(198.247,162.306) 201.803,158.75 201.803,110.998 205.105,107.696 205.105,69.85 205.74,69.215 205.74,64.008 205.105,63.373 205.105,11.45 CN1.20@206.395,10.16
  Mid-Layer 2 w0.254: P10.9@191.112,161.163 192.509,162.56 197.993,162.56 v1(198.247,162.306)
RESET_RF11: CN1.22 P11.9 | length 152.5
  Mid-Layer 1 w0.254: v1(174.625,108.712) 174.625,114.935 175.895,116.205 175.895,123.894 P11.9@177.096,125.095 ; v1(207.645,110.109) 207.645,70.739 206.375,69.469 206.375,63.754 207.645,62.484 207.645,11.41 CN1.22@208.895,10.16
  Mid-Layer 2 w0.254: v1(174.625,108.712) 175.26,108.712 175.387,108.839 199.898,108.839 200.533,109.474 207.01,109.474 v1(207.645,110.109)
RESET_RF12: CN1.24 P12.9 | length 135.5
  Mid-Layer 1 w0.254: v1(189.865,111.887) 189.865,123.848 P12.9@191.112,125.095 ; v1(208.915,111.887) 210.185,110.617 210.185,11.37 CN1.24@211.395,10.16
  Mid-Layer 2 w0.254: v1(189.865,111.887) v1(208.915,111.887)
RESET_RF13: CN1.26 P13.9 | length 162
  Mid-Layer 1 w0.254: v1(213.487,161.798) 213.487,126.619 213.868,126.238 213.868,112.141 214.63,111.379 214.63,105.156 215.138,104.648 215.138,11.403 CN1.26@213.895,10.16
  Mid-Layer 2 w0.254: P13.9@205.128,161.163 206.398,162.433 212.852,162.433 v1(213.487,161.798)
RESET_RF14: CN1.28 P14.9 | length 154.4
  Mid-Layer 1 w0.254: CN1.28@216.395,10.16 217.678,11.443 217.678,63.881 216.535,65.024 216.535,70.104 217.678,71.247 217.678,111.76 216.154,113.284 216.154,158.173 P14.9@219.144,161.163
RESET_RF15: CN1.30 P15.9 | length 132.3
  Mid-Layer 1 w0.254: P15.9@205.128,125.095 206.525,126.492 209.776,126.492 211.709,124.559 v1(211.709,110.617) ; CN1.30@218.895,10.16 220.218,11.483 220.218,63.373 219.202,64.389 219.202,70.104 220.218,71.12 v1(220.218,110.617)
  Mid-Layer 2 w0.254: v1(211.709,110.617) v1(220.218,110.617)
RESET_RF16: CN1.32 P16.9 | length 122.2
  Mid-Layer 1 w0.254: P16.9@219.144,125.095 220.541,126.492 222.885,126.492 224.028,125.349 224.028,113.284 222.631,111.887 222.631,11.396 CN1.32@221.395,10.16
RESET_RF17: CN1.34 P17.9 | length 158.1
  Mid-Layer 1 w0.254: CN1.34@223.895,10.16 225.044,11.309 225.044,158.623 v1(225.806,159.385)
  Mid-Layer 2 w0.254: v1(225.806,159.385) 228.473,159.385 230.251,161.163 P17.9@233.16,161.163
RESET_RF18: CN1.36 P18.9 | length 169.3
  Top Layer w0.254: v1(243.967,146.812) 243.967,157.953 P18.9@247.177,161.163
  Mid-Layer 1 w0.254: CN1.36@226.395,10.16 227.584,11.349 227.584,63.754 228.346,64.516 228.346,68.961 227.584,69.723 227.584,145.923 v1(228.473,146.812)
  Mid-Layer 2 w0.254: v1(228.473,146.812) v1(243.967,146.812)
RESET_RF19: CN1.38 P19.9 | length 117.6
  Mid-Layer 1 w0.254: CN1.38@228.895,10.16 230.251,11.516 230.251,63.627 231.394,64.77 231.394,68.072 230.251,69.215 230.251,122.186 P19.9@233.16,125.095
RESET_RF20: CN1.40 P20.9 | length 128.4
  Mid-Layer 1 w0.254: CN1.40@231.395,10.16 236.093,10.16 242.824,16.891 242.824,118.872 ; 242.824,120.742 242.824,118.872 ; v1(243.205,125.095) 242.824,124.714 242.824,118.872
  Mid-Layer 2 w0.254: v1(243.205,125.095) P20.9@247.177,125.095
RESET_RF21: P21.9 P26.1 | length 153.3
  Mid-Layer 1 w0.254: P26.1@254.508,10.668 255.778,11.938 255.778,145.288 258.064,147.574 258.064,158.034 P21.9@261.193,161.163
RESET_RF22: P22.9 P26.2 | length 212
  Mid-Layer 1 w0.254: P26.2@257.048,10.668 255.651,9.271 253.492,9.271 252.603,10.16 252.603,92.71 255.016,95.123 255.016,178.181 255.778,178.943 v1(258.318,178.943) v1@258.318,179.07 ; v1(273.812,178.943) 273.812,162.56 P22.9@275.209,161.163
  Mid-Layer 2 w0.254: v1(258.318,178.943) v1(273.812,178.943)
RESET_RF23: P23.9 P26.3 | length 124
  Mid-Layer 1 w0.254: P26.3@259.588,10.668 260.858,11.938 262.636,11.938 263.259,12.561 263.259,22.213 265.938,24.892 265.938,125.222 264.795,126.365 262.463,126.365 P23.9@261.193,125.095
RESET_RF24: P24.9 P26.4 | length 137.3
  Mid-Layer 1 w0.254: P26.4@262.128,10.668 262.128,8.382 262.89,7.62 275.082,7.62 275.844,8.382 275.844,31.877 275.844,99.695 270.764,104.775 270.764,120.65 P24.9@275.209,125.095
RXD0_RF1: P1.5 U3.48 | length 158.2
  Mid-Layer 2 w0.254: U3.48@17.399,110.617 18.669,111.887 18.669,116.205 19.177,116.713 108.077,116.713 108.712,116.078 v1(109.982,116.078) ; v1(116.205,166.243) P1.5@121.031,166.243
  Bottom Layer w0.254: v1(109.982,116.078) 114.681,116.078 116.205,117.602 v1(116.205,166.243)
RXD0_RF2: P2.5 U3.42 | length 214.4
  Mid-Layer 1 w0.254: v1(129.159,165.608) 129.159,84.836 v1(131.064,82.931)
  Mid-Layer 2 w0.254: U3.42@25.019,110.617 25.019,98.171 32.639,90.551 35.433,90.551 43.053,82.931 v1(131.064,82.931) ; v1(129.159,165.608) 129.794,166.243 P2.5@135.047,166.243
RXD0_RF3: P3.5 U3.36 | length 148.3
  Mid-Layer 1 w0.254: v1(98.171,128.778) 97.79,128.397 97.79,88.773 99.187,87.376 v1(99.187,86.106)
  Mid-Layer 2 w0.254: U3.36@32.639,110.617 32.639,102.489 49.022,86.106 v1(99.187,86.106) ; v1(98.171,128.778) 98.552,129.159 107.95,129.159 108.966,130.175 P3.5@121.031,130.175
RXD0_RF4: P4.5 U3.30 | length 145
  Mid-Layer 1 w0.254: v1(130.048,91.44) 130.048,113.157 v1(130.048,130.175)
  Mid-Layer 2 w0.254: U3.30@40.259,110.617 40.259,105.029 53.848,91.44 99.94,91.44 100.194,91.694 104.902,91.694 105.156,91.44 v1(130.048,91.44) ; v1(130.048,130.175) P4.5@135.047,130.175
RXD0_RF5: P5.5 U3.22 | length 177.2
  Mid-Layer 1 w0.254: v1(144.145,166.116) 144.145,110.871 144.907,110.109 v1(144.907,96.012)
  Mid-Layer 2 w0.254: U3.22@50.419,110.617 50.419,108.458 62.865,96.012 v1(144.907,96.012) ; v1(144.145,166.116) 148.936,166.116 P5.5@149.063,166.243
RXD0_RF6: P6.5 U3.16 | length 188.4
  Top Layer w0.254: P6.5@163.08,166.243 164.223,167.386 169.545,167.386 171.704,165.227 171.704,109.855 169.291,107.442 v1(169.291,102.997)
  Mid-Layer 2 w0.254: U3.16@58.039,110.617 58.175,110.617 62.484,106.308 62.484,106.172 66.548,102.108 167.513,102.108 168.402,102.997 v1(169.291,102.997)
RXD0_RF7: P7.5 U3.10 | length 111.3
  Mid-Layer 1 w0.254: v1@143.637,105.537 v1(143.764,105.41) 143.764,107.823 143.637,107.95 143.637,129.413 143.51,129.54 v1(143.51,130.175) v1@143.637,130.048
  Mid-Layer 2 w0.254: U3.10@65.659,110.617 65.795,110.617 70.104,106.308 70.104,106.172 70.866,105.41 v1(143.764,105.41) ; v1(143.51,130.175) P7.5@149.063,130.175 P7.5@148.936,130.302
RXD0_RF8: P8.5 U3.4 | length 112.8
  Mid-Layer 1 w0.254: v1(161.417,108.966) 161.417,128.512 P8.5@163.08,130.175
  Mid-Layer 2 w0.254: U3.4@73.279,110.617 74.93,108.966 158.496,108.966 ; 160.528,108.966 158.496,108.966 ; v1(161.417,108.966) 158.496,108.966
RXD0_RF9: P9.5 U2.48 | length 220.8
  Mid-Layer 2 w0.254: U2.48@17.399,135.255 29.972,122.682 v1(110.744,122.682)
  Bottom Layer w0.254: v1(110.744,122.682) 112.776,122.682 114.554,124.46 114.554,171.069 118.11,174.625 169.291,174.625 170.942,172.974 170.942,166.751 171.45,166.243 P9.5@177.096,166.243
RXD0_RF10: P10.5 U2.42 | length 234.3
  Mid-Layer 2 w0.254: v1(169.164,172.212) 169.926,172.974 180.34,172.974 187.071,166.243 P10.5@191.112,166.243
  Bottom Layer w0.254: U2.42@25.019,135.255 44.831,115.443 v1(111.252,115.443) 115.062,115.443 116.84,117.221 116.84,171.958 118.745,173.863 167.513,173.863 v1(169.164,172.212)
RXD0_RF11: P11.5 U2.36 | length 160.9
  Mid-Layer 1 w0.254: v1@112.649,118.736 v1(112.649,118.745) ; v1(174.498,124.206) 174.498,125.349 175.387,126.238 175.387,128.466 P11.5@177.096,130.175
  Mid-Layer 2 w0.254: v1(112.649,118.745) 112.649,120.65 115.824,123.825 174.117,123.825 v1(174.498,124.206)
  Bottom Layer w0.254: U2.36@32.639,135.255 49.149,118.745 105.918,118.745 ; 107.061,118.745 105.918,118.745 ; v1(112.649,118.745) 111.887,119.507 109.093,119.507 108.331,118.745 105.918,118.745
RXD0_RF12: P12.5 U2.30 | length 211.8
  Mid-Layer 1 w0.254: v1(111.76,122.047) 113.665,122.047 115.951,119.761 v1(115.951,100.711) ; 188.976,123.615 188.976,121.92 ; P12.5@191.112,130.175 188.976,128.039 188.976,121.92 ; v1(191.897,101.981) 188.976,104.902 188.976,121.92
  Mid-Layer 2 w0.254: v1(115.951,100.711) 117.729,100.711 118.618,101.6 191.516,101.6 v1(191.897,101.981)
  Bottom Layer w0.254: U2.30@40.259,135.255 54.102,121.412 105.156,121.412 ; 106.807,121.412 105.156,121.412 ; v1(111.76,122.047) 108.585,122.047 107.95,121.412 105.156,121.412
RXD0_RF13: P13.5 U2.22 | length 215.8
  Bottom Layer w0.254: U2.22@50.419,135.255 59.944,125.73 110.363,125.73 112.522,127.889 112.522,174.879 114.3,176.657 198.247,176.657 200.406,174.498 200.406,167.259 201.422,166.243 P13.5@205.128,166.243
RXD0_RF14: P14.5 U2.16 | length 222.6
  Bottom Layer w0.254: U2.16@58.039,135.255 65.024,128.27 91.313,128.27 91.567,128.016 105.283,128.016 105.537,128.27 v1(106.807,128.27) 110.236,128.27 111.252,129.286 111.252,176.403 113.03,178.181 213.614,178.181 215.392,176.403 215.392,167.513 216.662,166.243 P14.5@219.144,166.243
RXD0_RF15: P15.5 U2.10 | length 142.1
  Mid-Layer 2 w0.254: v1(106.807,130.937) 116.713,130.937 117.348,131.572 203.731,131.572 P15.5@205.128,130.175
  Bottom Layer w0.254: U2.10@65.659,135.255 69.977,130.937 v1(106.807,130.937)
RXD0_RF16: P16.5 U2.4 | length 212.9
  Top Layer w0.254: v1(106.553,133.858) 105.664,133.858 105.029,133.223 105.029,109.728 107.696,107.061 v1(107.696,100.965)
  Mid-Layer 1 w0.254: v1(218.948,102.616) 218.44,103.124 218.44,112.141 216.789,113.792 216.789,127.82 P16.5@219.144,130.175
  Mid-Layer 2 w0.254: v1(107.696,100.965) 107.696,100.956 110.227,98.425 119.253,98.425 120.523,99.695 166.116,99.695 166.624,99.187 191.262,99.187 194.691,102.616 v1(218.948,102.616)
  Bottom Layer w0.254: U2.4@73.279,135.255 74.676,133.858 v1(106.553,133.858)
RXD0_RF17: P17.5 U1.48 | length 255.7
  Mid-Layer 1 w0.254: v1(230.886,181.229) 230.886,168.517 P17.5@233.16,166.243
  Mid-Layer 2 w0.254: U1.48@17.399,159.893 16.002,158.496 13.716,158.496 11.43,160.782 11.43,168.148 24.511,181.229 v1(230.886,181.229)
RXD0_RF18: P18.5 U1.42 | length 273.4
  Top Layer w0.254: v1(108.585,144.399) 109.601,145.415 v1(109.601,170.688) ; v1(243.332,179.705) 244.348,178.689 244.348,169.072 P18.5@247.177,166.243
  Mid-Layer 2 w0.254: U1.42@25.019,159.893 40.513,144.399 v1(108.585,144.399)
  Bottom Layer w0.254: v1(109.601,170.688) 109.601,177.8 111.506,179.705 v1(243.332,179.705)
RXD0_RF19: P19.5 U1.36 | length 217.4
  Mid-Layer 1 w0.254: v1(231.267,139.827) 231.267,132.068 P19.5@233.16,130.175
  Mid-Layer 2 w0.254: U1.36@32.639,159.893 46.228,146.304 111.125,146.304 117.602,139.827 v1(231.267,139.827)
RXD0_RF20: P20.5 U1.30 | length 284.5
  Top Layer w0.254: v1(101.6,148.463) 101.464,148.463 100.838,149.089 100.838,170.434 v1(108.585,178.181)
  Mid-Layer 1 w0.254: v1(240.538,178.181) 242.57,176.149 242.57,135.636 243.078,135.128 v1(243.078,130.175)
  Mid-Layer 2 w0.254: U1.30@40.259,159.893 51.689,148.463 v1(101.6,148.463) ; v1(108.585,178.181) v1(240.538,178.181) ; v1(243.078,130.175) P20.5@247.177,130.175
RXD0_RF21: P21.5 U1.22 | length 244.5
  Top Layer w0.254: v1(103.505,151.13) 103.505,169.799 v1(108.458,174.752)
  Mid-Layer 1 w0.254: v1(259.334,176.149) 259.334,168.102 P21.5@261.193,166.243
  Mid-Layer 2 w0.254: U1.22@50.419,159.893 59.055,151.257 103.378,151.257 v1(103.505,151.13) ; v1(108.458,174.752) 109.855,176.149 v1(259.334,176.149)
RXD0_RF22: P22.5 U1.16 | length 252.3
  Top Layer w0.254: v1(107.188,151.257) 107.188,170.57 108.322,171.704 v1(108.331,171.704)
  Mid-Layer 1 w0.254: v1(271.272,166.116) 271.272,172.212 v1(272.542,173.482)
  Mid-Layer 2 w0.254: U1.16@58.039,159.893 64.135,153.797 104.648,153.797 v1(107.188,151.257) ; v1(108.331,171.704) 110.109,173.482 126.746,173.482 127.254,173.99 139.573,173.99 140.081,173.482 167.132,173.482 167.64,173.99 181.229,173.99 181.737,173.482 268.859,173.482 ; 269.875,173.482 268.859,173.482 ; v1(271.272,166.116) 275.082,166.116 P22.5@275.209,166.243 ; v1(272.542,173.482) 268.859,173.482
RXD0_RF23: P23.5 U1.10 | length 213.6
  Mid-Layer 1 w0.254: v1(259.08,142.113) 259.08,132.288 P23.5@261.193,130.175
  Mid-Layer 2 w0.254: U1.10@65.659,159.893 69.723,155.829 106.68,155.829 119.888,142.621 258.572,142.621 v1(259.08,142.113)
RXD0_RF24: P24.5 U1.4 | length 231.5
  Mid-Layer 1 w0.254: P24.5@275.209,130.175 273.431,131.953 273.431,142.621 v1(275.717,144.907)
  Mid-Layer 2 w0.254: U1.4@73.279,159.893 74.676,158.496 107.315,158.496 120.904,144.907 v1(275.717,144.907) 282.194,144.907
TXD0_RF1: P1.6 U3.46 | length 210.4
  Mid-Layer 1 w0.254: v1(106.426,80.899) 106.426,94.107 104.013,96.52 104.013,137.922 113.284,147.193 113.284,163.957 ; 113.284,165.354 113.284,163.957 ; v1(115.443,168.148) 113.284,165.989 113.284,163.957
  Mid-Layer 2 w0.254: U3.46@19.939,110.617 19.939,96.393 35.433,80.899 v1(106.426,80.899) ; v1(115.443,168.148) 117.551,168.148 118.186,167.513 122.301,167.513 P1.6@123.571,166.243
TXD0_RF2: P2.6 U3.40 | length 216.7
  Mid-Layer 1 w0.254: v1(139.827,84.836) 142.494,87.503 142.494,129.076 142.113,129.457 142.113,130.429 142.113,151.892 141.732,152.273 v1(141.732,164.846)
  Mid-Layer 2 w0.254: U3.40@27.559,110.617 27.559,98.933 34.671,91.821 37.338,91.821 45.212,83.947 138.938,83.947 v1(139.827,84.836) ; P2.6@137.587,166.243 140.335,166.243 v1(141.732,164.846)
TXD0_RF3: P3.6 U3.34 | length 146.6
  Mid-Layer 2 w0.254: U3.34@35.179,110.617 35.179,103.251 50.673,87.757 123.19,87.757 v1(123.444,88.011)
  Bottom Layer w0.254: v1(123.444,88.011) 126.238,90.805 126.238,127.508 P3.6@123.571,130.175
TXD0_RF4: P4.6 U3.28 | length 144.9
  Mid-Layer 1 w0.254: P4.6@137.587,130.175 139.827,127.935 139.827,112.903 139.827,93.218 v1(139.573,92.964)
  Mid-Layer 2 w0.254: U3.28@42.799,110.617 42.799,106.299 56.134,92.964 v1(139.573,92.964)
TXD0_RF5: P5.6 U3.20 | length 181.9
  Top Layer w0.254: P5.6@151.603,166.243 154.432,166.243 156.21,164.465 v1(156.21,97.282)
  Mid-Layer 2 w0.254: U3.20@52.959,110.617 66.294,97.282 98.933,97.282 99.695,96.52 143.637,96.52 144.399,97.282 v1(156.21,97.282)